# Altium PCB LEDs_2.PcbDoc
Units mm, origin at the board's own origin, x right, y up, seen from the top; angles counter-clockwise.
Board outline 19 x 19 mm, 2 copper layers (Top Layer, Bottom Layer); 66 components, 9 nets, 151 pads, 63 vias.
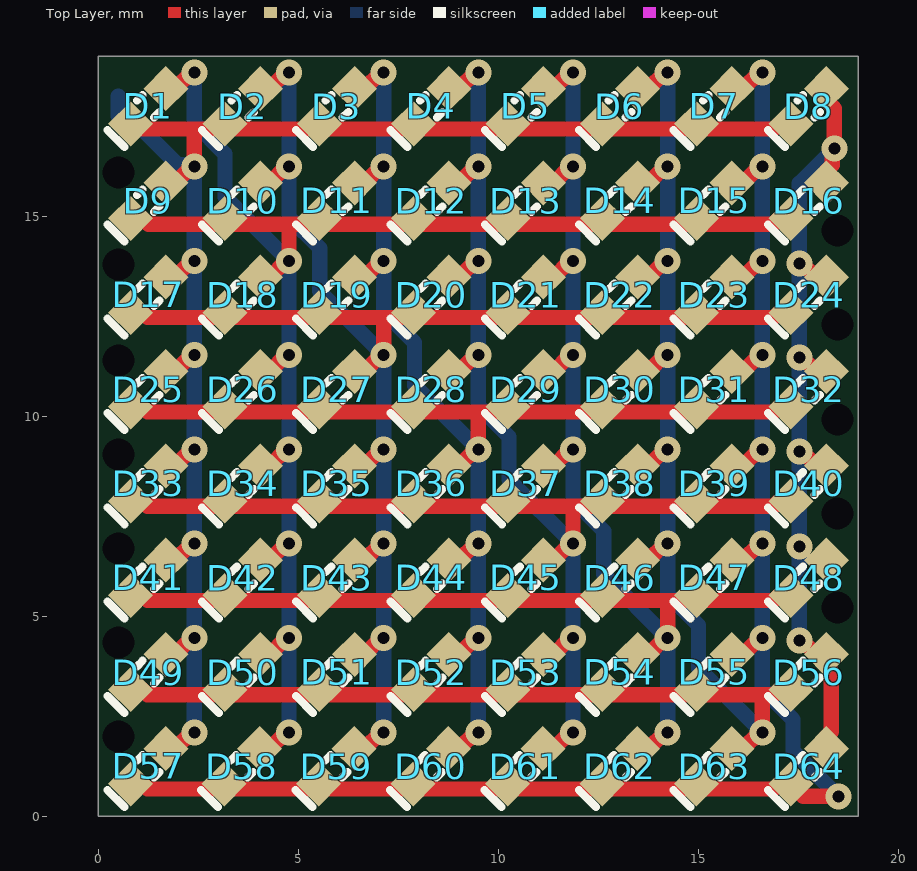
[diagram p0: Top Layer view]
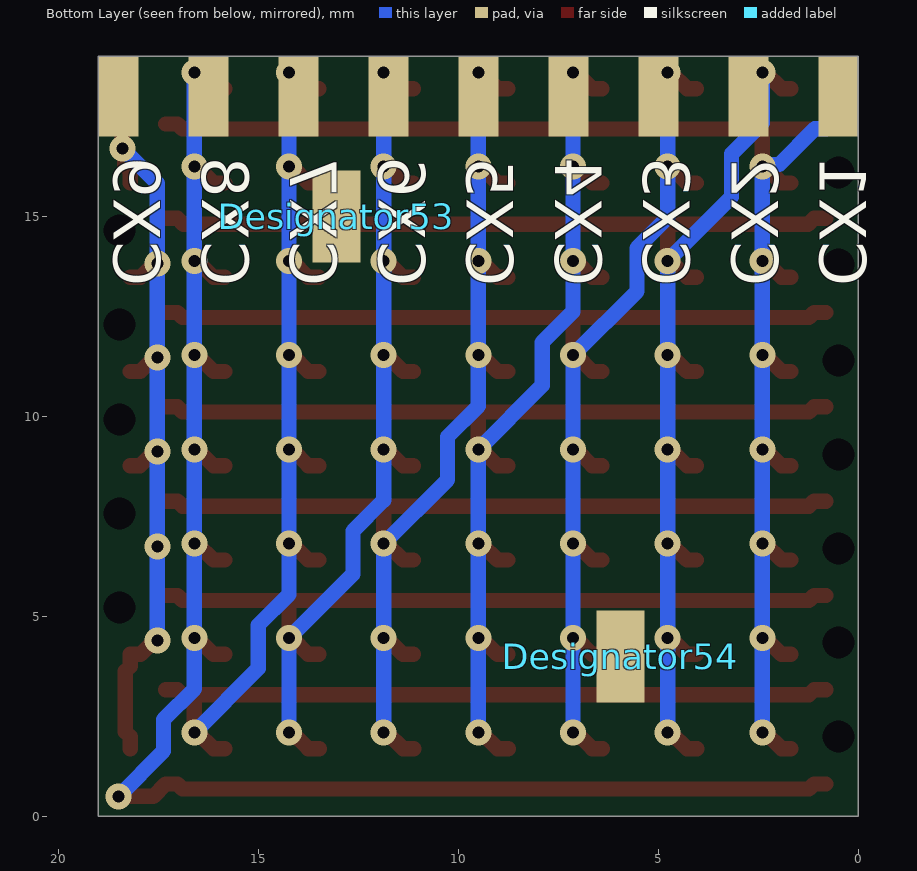
[diagram p1: Bottom Layer view, seen from below]
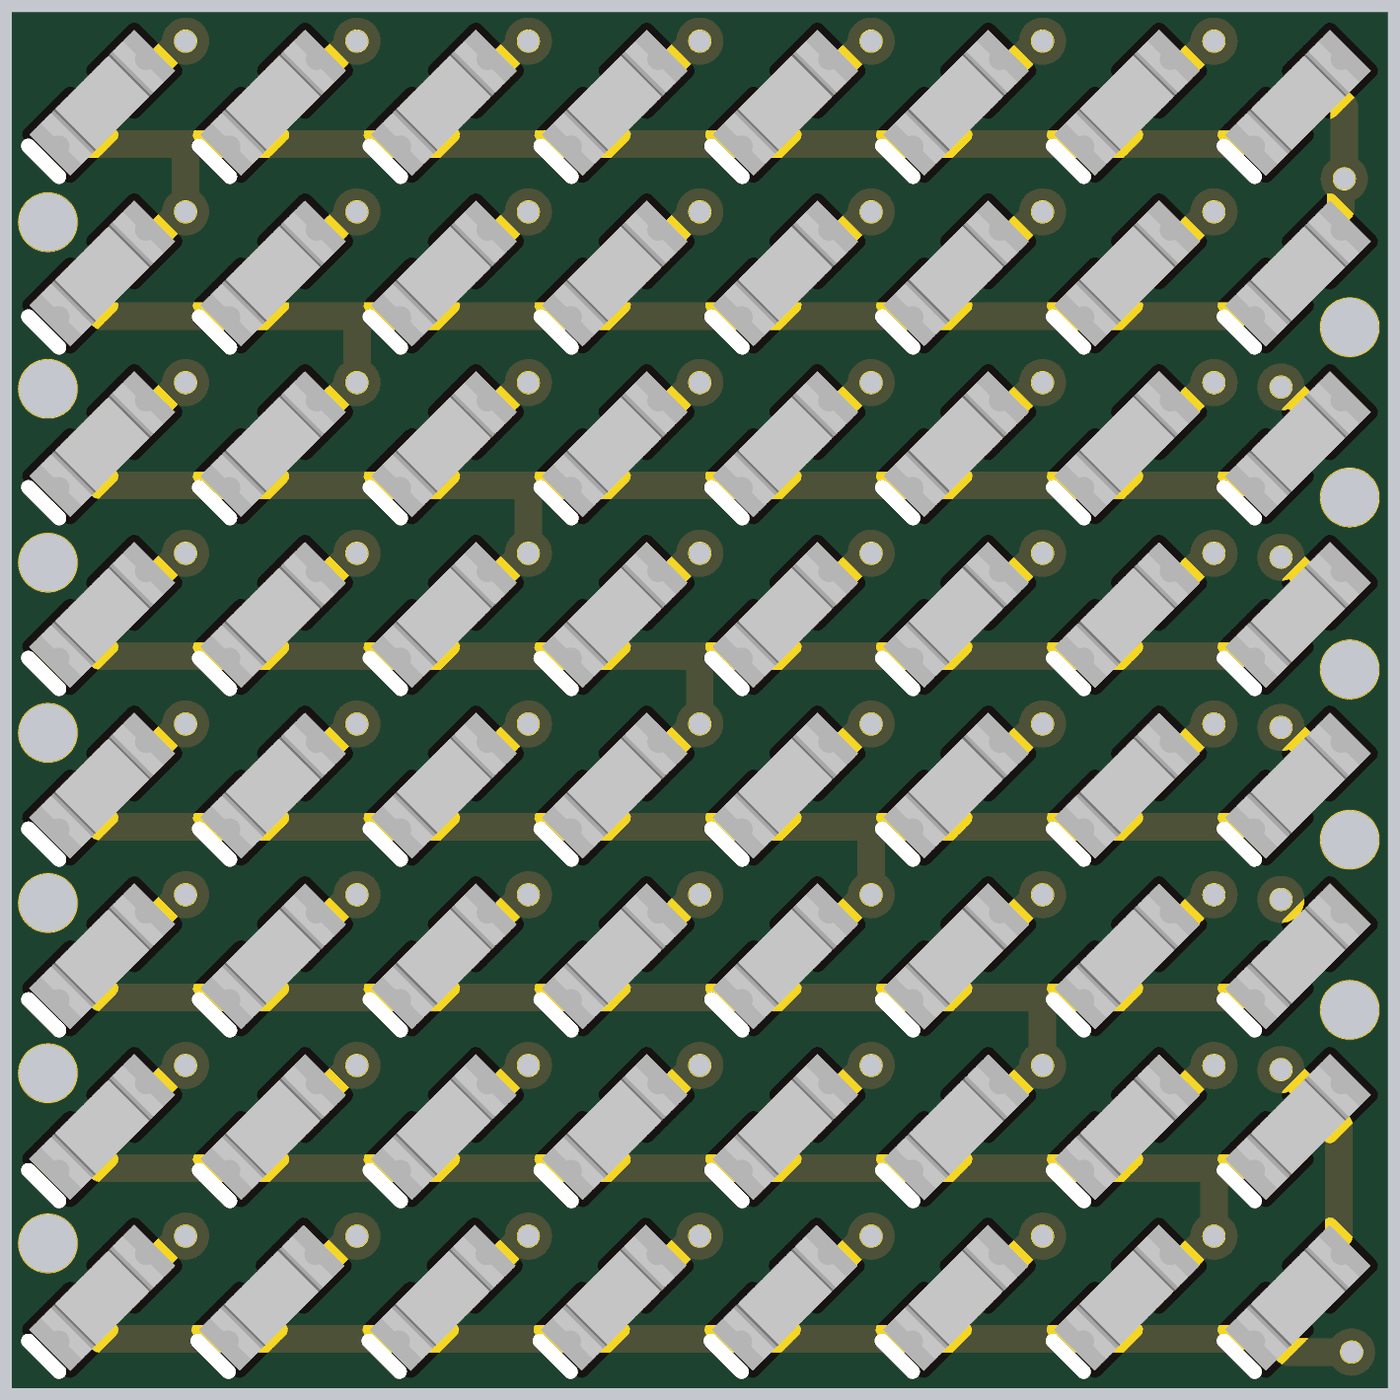
[diagram p2: 3D render of the assembled board from above, using the file's embedded part models]

## Layer stack, top to bottom
Top Solder: solder mask 0.0102, Solder Resist, Dk 3.5
Top Layer: signal copper 0.0356
Dielectric 1: dielectric 0.32, FR-4, Dk 4.8
Bottom Layer: signal copper 0.0356
Bottom Solder: solder mask 0.0102, Solder Resist, Dk 3.5

## Board outline
0,0 19,0 19,19 0,19

## Design rules (kind name [scope] priority, off if disabled: settings)
Clearance [All] p1: gap=0.254 ignorepadtopadclearanceinfootprint=FALSE except(0: Arc-Hole Track-Hole SMDPad-Hole THPad-Hole Via-Hole Fill-Hole Poly-Hole Region-Hole Text-Hole)
HoleSize [All] p1: absolutevalues=TRUE maxlimit=200.54 minlimit=0.3 maxpercent=80.000 minpercent=20.000
PolygonConnect [All] p1: connectstyle=Relief reliefconductorwidth=0.254 reliefentries=4 polygonreliefangle="90 Angle" airgapwidth=0.254
RoutingVias [All] p1: holewidth=0.3 width=0.61 viastyle="Through Hole" minholewidth=0.3 minwidth=0.61 maxholewidth=10 maxwidth=12.7
SolderMaskExpansion [All] p1: expansion=0.102
Width [All] p1: maxlimit=2.54 minlimit=0.152 preferedwidth=0.254
29 further rules are at their usual default settings.

## Components (designator, comment, footprint, x,y, rotation, side; value= is the part's Value field where it differs from the comment)
D1 "SMD LED" SML-D12x1 1.25,17.75 r45 top locked
D2 "SMD LED" SML-D12x1 3.608,17.75 r45 top locked
D3 "SMD LED" SML-D12x1 5.967,17.75 r45 top locked
D4 "SMD LED" SML-D12x1 8.325,17.75 r45 top locked
D5 "SMD LED" SML-D12x1 10.683,17.75 r45 top locked
D6 "SMD LED" SML-D12x1 13.041,17.75 r45 top locked
D7 "SMD LED" SML-D12x1 15.4,17.75 r45 top locked
D8 "SMD LED" SML-D12x1 17.758,17.75 r45 top locked
D9 "SMD LED" SML-D12x1 1.25,15.393 r45 top locked
D10 "SMD LED" SML-D12x1 3.608,15.393 r45 top locked
D11 "SMD LED" SML-D12x1 5.967,15.393 r45 top locked
D12 "SMD LED" SML-D12x1 8.325,15.393 r45 top locked
D13 "SMD LED" SML-D12x1 10.683,15.393 r45 top locked
D14 "SMD LED" SML-D12x1 13.041,15.393 r45 top locked
D15 "SMD LED" SML-D12x1 15.4,15.393 r45 top locked
D16 "SMD LED" SML-D12x1 17.758,15.393 r45 top locked
D17 "SMD LED" SML-D12x1 1.25,13.036 r45 top locked
D18 "SMD LED" SML-D12x1 3.608,13.036 r45 top locked
D19 "SMD LED" SML-D12x1 5.967,13.036 r45 top locked
D20 "SMD LED" SML-D12x1 8.325,13.036 r45 top locked
D21 "SMD LED" SML-D12x1 10.683,13.036 r45 top locked
D22 "SMD LED" SML-D12x1 13.041,13.036 r45 top locked
D23 "SMD LED" SML-D12x1 15.4,13.036 r45 top locked
D24 "SMD LED" SML-D12x1 17.758,13.036 r45 top locked
D25 "SMD LED" SML-D12x1 1.25,10.679 r45 top locked
D26 "SMD LED" SML-D12x1 3.608,10.679 r45 top locked
D27 "SMD LED" SML-D12x1 5.967,10.679 r45 top locked
D28 "SMD LED" SML-D12x1 8.325,10.679 r45 top locked
D29 "SMD LED" SML-D12x1 10.683,10.679 r45 top locked
D30 "SMD LED" SML-D12x1 13.041,10.679 r45 top locked
D31 "SMD LED" SML-D12x1 15.4,10.679 r45 top locked
D32 "SMD LED" SML-D12x1 17.758,10.679 r45 top locked
D33 "SMD LED" SML-D12x1 1.25,8.321 r45 top locked
D34 "SMD LED" SML-D12x1 3.608,8.321 r45 top locked
D35 "SMD LED" SML-D12x1 5.967,8.321 r45 top locked
D36 "SMD LED" SML-D12x1 8.325,8.321 r45 top locked
D37 "SMD LED" SML-D12x1 10.683,8.321 r45 top locked
D38 "SMD LED" SML-D12x1 13.041,8.321 r45 top locked
D39 "SMD LED" SML-D12x1 15.4,8.321 r45 top locked
D40 "SMD LED" SML-D12x1 17.758,8.321 r45 top locked
D41 "SMD LED" SML-D12x1 1.25,5.964 r45 top locked
D42 "SMD LED" SML-D12x1 3.608,5.964 r45 top locked
D43 "SMD LED" SML-D12x1 5.967,5.964 r45 top locked
D44 "SMD LED" SML-D12x1 8.325,5.964 r45 top locked
D45 "SMD LED" SML-D12x1 10.683,5.964 r45 top locked
D46 "SMD LED" SML-D12x1 13.041,5.964 r45 top locked
D47 "SMD LED" SML-D12x1 15.4,5.964 r45 top locked
D48 "SMD LED" SML-D12x1 17.758,5.964 r45 top locked
D49 "SMD LED" SML-D12x1 1.25,3.607 r45 top locked
D50 "SMD LED" SML-D12x1 3.608,3.607 r45 top locked
D51 "SMD LED" SML-D12x1 5.967,3.607 r45 top locked
D52 "SMD LED" SML-D12x1 8.325,3.607 r45 top locked
D53 "SMD LED" SML-D12x1 10.683,3.607 r45 top locked
D54 "SMD LED" SML-D12x1 13.041,3.607 r45 top locked
D55 "SMD LED" SML-D12x1 15.4,3.607 r45 top locked
D56 "SMD LED" SML-D12x1 17.758,3.607 r45 top locked
D57 "SMD LED" SML-D12x1 1.25,1.25 r45 top locked
D58 "SMD LED" SML-D12x1 3.589,1.25 r45 top locked
D59 "SMD LED" SML-D12x1 5.951,1.25 r45 top locked
D60 "SMD LED" SML-D12x1 8.312,1.25 r45 top locked
D61 "SMD LED" SML-D12x1 10.673,1.25 r45 top locked
D62 "SMD LED" SML-D12x1 13.035,1.25 r45 top locked
D63 "SMD LED" SML-D12x1 15.396,1.25 r45 top locked
D64 "SMD LED" SML-D12x1 17.758,1.25 r45 top locked
Designator53 "Comment" S0911-46R 13.05,15 r270 bottom
Designator54 "Comment" S0911-46R 5.95,4 r90 bottom

## Footprints (in the part's own frame and the unit in brackets; to place one, negate y for a bottom-side part, rotate by r counter-clockwise, add the part's x,y. Pads: shape width x height; smd on the part's side, far side on the other; paste and mask are expansions set on the pad)
S0911-46R [mm]
  rect 2.3x1.2 smd paste-10: CX13(0,0)
  body extent -1.15,-0.7 1.15,0.7, height 2
SML-D12x1 [mm]
  rect 0.8x0.8 smd: 1(-0.625,0) 2(0.625,0)
  silkscreen extent -1.14,-0.3 0.1,0.3, body extent -0.8,-0.4 0.8,0.4, height 0.55

## Part data
D1 D2 D3 D4 D5 D6 D7 D8 D9 D10 D11 D12 D13 D14 D15 D16 D17 D18 D19 D20 D21 D22 D23 D24 D25 D26 D27 D28 D29 D30 D31 D32 D33 D34 D35 D36 D37 D38 D39 D40 D41 D42 D43 D44 D45 D46 D47 D48 D49 D50 D51 D52 D53 D54 D55 D56 D57 D58 D59 D60 D61 D62 D63 D64: library part SML-D12U1WT86, "LED RED DIFFUSED 1608 SMD", Case/Package=0603, Case Code (Metric)=1608, Color=Red, Forward Voltage=2.2V, Lens Color=White, Manufacturer=Rohm, Supplier Part Number 1=SML-D12U1WT86CT-ND, Test Current=20mA, Case Code (Imperial)=0603, ComponentLink1Description=https://www.rohm.com/datasheet/SML-D12U1W?src-supplier=Digi-Key, ComponentLink1URL=https://www.rohm.com/datasheet/SML-D12U1W?src-supplier=Digi-Key, Dominant Wavelength=620nm, Height=0.65mm, Lead Free="Lead Free", Length=1.6mm, Lens Transparency=Diffused, Luminous Intensity=63mcd, Manufacturer Part Number=SML-D12U1WT86, Mount="Surface Mount", Packaging="Tape and Reel", Pricing 1="1 = 0,22000, 10 = 0,16200, 25 = 0,11920, 100 = 0,08530, 250 = 0,05796, 500 = 0,05116, 1000 = 0,04007 (USD)", RoHS=Yes, Stock 1=91784, Supplier 1=Digi-Key, Width=0.8mm

## Free pads (board coordinates)
  rect 1x2 smd far side paste-10: CX11(0.5,18) CX11(2.75,18) CX11(5,18) CX11(7.25,18) CX11(9.5,18) CX11(11.75,18) CX11(14,18) CX11(16.25,18) CX11(18.5,18)
  round 0 hole 0.8: CX12(0.5,2) CX12(0.5,4.35) CX12(0.5,6.7) CX12(0.5,9.05) CX12(0.5,11.4) CX12(0.5,13.8) CX12(0.5,16.1) CX12(18.475,5.225) CX12(18.475,7.575) CX12(18.475,9.925) CX12(18.475,12.3) CX12(18.475,14.65)

## Via types
v1: diameter 0.65, hole 0.3, Top Layer to Bottom Layer, tented both sides, 63 vias

## Nets (pads, with @x,y where several pads share a name; then routed paths per layer and width w, separated by ;. In a path a pad name is that pad's centre, name@x,y a point inside that pad or via, vN(x,y) a via of type N, cw(c..) or ccw(c..) an arc to the next point about the centre after c; other vN are vias at no path point)
CA1: D1.1 D2.1 D3.1 D4.1 D5.1 D6.1 D7.1 D8.1 D9.2 D17.2 D25.2 D33.2 D41.2 D49.2 D57.2 pad.CX11@0.5,18 | length 40.7
  Top Layer w0.381: D1.1@0.808,17.182 2.4,17.182 ; D57.2 1.919,1.692 2.327,2.1 v1(2.4,2.1) ; D49.2 1.919,4.049 2.327,4.457 v1(2.4,4.457) ; D41.2 1.919,6.406 2.327,6.814 v1(2.4,6.814) ; D33.2 1.919,8.763 2.327,9.171 v1(2.4,9.171) ; D25.2 1.919,11.121 2.327,11.529 v1(2.4,11.529) ; D17.2 1.919,13.478 2.327,13.886 v1(2.4,13.886) ; D9.2 1.919,15.835 2.327,16.243 v1(2.4,16.243) 2.4,17.182 ; D8.1 17.02,17.308 16.893,17.182 2.4,17.182
  Bottom Layer w0.381: pad.CX11@0.5,18 0.5,17.5 0.81,17.19 1.081,17.19 1.977,16.294 2.349,16.294 v1(2.4,16.243) v1(2.4,13.886) v1(2.4,11.529) v1(2.4,9.171) v1(2.4,6.814) v1(2.4,4.457) v1(2.4,2.1)
CA2: D1.2 D9.1 D10.1 D11.1 D12.1 D13.1 D14.1 D15.1 D16.1 D18.2 D26.2 D34.2 D42.2 D50.2 D58.2 pad.CX11@2.75,18 | length 41.3
  Top Layer w0.381: D9.1 1.104,14.951 1.255,14.8 4.8,14.8 ; D1.2 1.919,18.192 2.327,18.6 v1(2.4,18.6) ; D58.2 4.286,1.692 4.694,2.1 v1(4.767,2.1) ; D50.2 4.286,4.049 4.694,4.457 v1(4.767,4.457) ; D42.2 4.286,6.406 4.694,6.814 v1(4.767,6.814) ; D34.2 4.286,8.763 4.694,9.171 v1(4.767,9.171) ; D26.2 4.286,11.121 4.694,11.529 v1(4.767,11.529) ; D18.2 4.286,13.478 4.694,13.886 v1(4.767,13.886) 4.767,14.767 4.8,14.8 ; D16.1 17.02,14.951 16.869,14.8 4.8,14.8
  Bottom Layer w0.381: v1(2.4,18.6) 2.4,17.331 3.17,16.562 3.17,15.483 v1(4.767,13.886) v1(4.767,11.529) v1(4.767,9.171) v1(4.767,6.814) v1(4.767,4.457) v1(4.767,2.1)
CA3: D2.2 D10.2 D17.1 D18.1 D19.1 D20.1 D21.1 D22.1 D23.1 D24.1 D27.2 D35.2 D43.2 D51.2 D59.2 pad.CX11@5,18 | length 41.3
  Top Layer w0.381: D17.1 1.104,12.594 1.231,12.467 7.133,12.467 ; D10.2 4.286,15.835 4.694,16.243 v1(4.767,16.243) ; D2.2 4.286,18.192 4.694,18.6 v1(4.767,18.6) ; D59.2 6.652,1.692 7.061,2.1 v1(7.133,2.1) ; D51.2 6.652,4.049 7.061,4.457 v1(7.133,4.457) ; D43.2 6.652,6.406 7.061,6.814 v1(7.133,6.814) ; D35.2 6.652,8.763 7.061,9.171 v1(7.133,9.171) ; D27.2 6.652,11.121 7.061,11.529 v1(7.133,11.529) 7.133,12.467 ; D24.1 17.02,12.594 16.893,12.467 7.133,12.467
  Bottom Layer w0.381: v1(4.767,18.6) v1(4.767,16.243) 4.767,14.974 5.536,14.204 5.536,13.126 v1(7.133,11.529) v1(7.133,9.171) v1(7.133,6.814) v1(7.133,4.457) v1(7.133,2.1)
CA4: D3.2 D11.2 D19.2 D25.1 D26.1 D27.1 D28.1 D29.1 D30.1 D31.1 D32.1 D36.2 D44.2 D52.2 D60.2 pad.CX11@7.25,18 | length 41.3
  Top Layer w0.381: D25.1 1.104,10.237 1.231,10.11 9.5,10.11 ; D19.2 6.652,13.478 7.061,13.886 v1(7.133,13.886) ; D11.2 6.652,15.835 7.061,16.243 v1(7.133,16.243) ; D3.2 6.652,18.192 7.061,18.6 v1(7.133,18.6) ; D60.2 9.019,1.692 9.427,2.1 v1(9.5,2.1) ; D52.2 9.019,4.049 9.427,4.457 v1(9.5,4.457) ; D44.2 9.019,6.406 9.427,6.814 v1(9.5,6.814) ; D36.2 9.019,8.763 9.427,9.171 v1(9.5,9.171) 9.5,10.11 ; D32.1 17.02,10.237 16.893,10.11 9.5,10.11
  Bottom Layer w0.381: v1(7.133,18.6) v1(7.133,16.243) v1(7.133,13.886) 7.133,12.617 7.903,11.847 7.903,10.769 v1(9.5,9.171) v1(9.5,6.814) v1(9.5,4.457) v1(9.5,2.1)
CA5: D4.2 D12.2 D20.2 D28.2 D33.1 D34.1 D35.1 D36.1 D37.1 D38.1 D39.1 D40.1 D45.2 D53.2 D61.2 pad.CX11@9.5,18 | length 41.4
  Top Layer w0.381: D33.1 1.104,7.879 1.231,7.753 11.9,7.753 ; D28.2 9.019,11.121 9.427,11.529 v1(9.5,11.529) ; D20.2 9.019,13.478 9.427,13.886 v1(9.5,13.886) ; D12.2 9.019,15.835 9.427,16.243 v1(9.5,16.243) ; D4.2 9.019,18.192 9.427,18.6 v1(9.5,18.6) ; D61.2 11.386,1.692 11.794,2.1 v1(11.867,2.1) ; D53.2 11.386,4.049 11.794,4.457 v1(11.867,4.457) ; D45.2 11.386,6.406 11.794,6.814 v1(11.867,6.814) 11.867,7.72 11.9,7.753 ; D40.1 17.02,7.879 16.893,7.753 11.9,7.753
  Bottom Layer w0.381: v1(9.5,18.6) v1(9.5,16.243) v1(9.5,13.886) v1(9.5,11.529) 9.5,10.26 10.269,9.49 10.269,8.411 v1(11.867,6.814) v1(11.867,4.457) v1(11.867,2.1)
CA6: D5.2 D13.2 D21.2 D29.2 D37.2 D41.1 D42.1 D43.1 D44.1 D45.1 D46.1 D47.1 D48.1 D54.2 D62.2 pad.CX11@11.75,18 | length 41.4
  Top Layer w0.381: D41.1 1.104,5.522 1.231,5.396 14.2,5.396 ; D37.2 11.386,8.763 11.794,9.171 v1(11.867,9.171) ; D29.2 11.386,11.121 11.794,11.529 v1(11.867,11.529) ; D21.2 11.386,13.478 11.794,13.886 v1(11.867,13.886) ; D13.2 11.386,15.835 11.794,16.243 v1(11.867,16.243) ; D5.2 11.386,18.192 11.794,18.6 v1(11.867,18.6) ; D62.2 13.752,1.692 14.161,2.1 v1(14.233,2.1) ; D54.2 13.752,4.049 14.161,4.457 v1(14.233,4.457) 14.233,5.363 14.2,5.396 ; D48.1 17.02,5.522 16.893,5.396 14.2,5.396
  Bottom Layer w0.381: v1(11.867,18.6) v1(11.867,16.243) v1(11.867,13.886) v1(11.867,11.529) v1(11.867,9.171) 11.867,7.903 12.636,7.133 12.636,6.054 v1(14.233,4.457) v1(14.233,2.1)
CA7: D6.2 D14.2 D22.2 D30.2 D38.2 D46.2 D49.1 D50.1 D51.1 D52.1 D53.1 D54.1 D55.1 D56.1 D63.2 pad.CX11@14,18 | length 41.5
  Top Layer w0.381: D49.1 1.104,3.165 1.231,3.039 16.6,3.039 ; D46.2 13.752,6.406 14.161,6.814 v1(14.233,6.814) ; D38.2 13.752,8.763 14.161,9.171 v1(14.233,9.171) ; D30.2 13.752,11.121 14.161,11.529 v1(14.233,11.529) ; D22.2 13.752,13.478 14.161,13.886 v1(14.233,13.886) ; D14.2 13.752,15.835 14.161,16.243 v1(14.233,16.243) ; D6.2 13.752,18.192 14.161,18.6 v1(14.233,18.6) ; D63.2 16.119,1.692 16.527,2.1 v1(16.6,2.1) 16.6,3.039 ; D56.1 17.02,3.165 16.893,3.039 16.6,3.039
  Bottom Layer w0.381: v1(14.233,18.6) v1(14.233,16.243) v1(14.233,13.886) v1(14.233,11.529) v1(14.233,9.171) v1(14.233,6.814) 14.233,5.545 15.003,4.776 15.003,3.697 v1(16.6,2.1)
CA8: D7.2 D15.2 D23.2 D31.2 D39.2 D47.2 D55.2 D57.1 D58.1 D59.1 D60.1 D61.1 D62.1 D63.1 D64.1 pad.CX11@16.25,18 | length 43.3
  Top Layer w0.381: D57.1 1.104,0.808 1.231,0.682 7.87,0.682 12.593,0.682 16.893,0.682 17.02,0.808 D64.1 17.624,0.5 v1(18.5,0.5) ; D55.2 16.119,4.049 16.527,4.457 v1(16.6,4.457) ; D47.2 16.119,6.406 16.527,6.814 v1(16.6,6.814) ; D39.2 16.119,8.763 16.527,9.171 v1(16.6,9.171) ; D31.2 16.119,11.121 16.527,11.529 v1(16.6,11.529) ; D23.2 16.119,13.478 16.527,13.886 v1(16.6,13.886) ; D15.2 16.119,15.835 16.527,16.243 v1(16.6,16.243) ; D7.2 16.119,18.192 16.527,18.6 v1(16.6,18.6)
  Bottom Layer w0.381: v1(16.6,18.6) v1(16.6,16.243) v1(16.6,13.886) v1(16.6,11.529) v1(16.6,9.171) v1(16.6,6.814) v1(16.6,4.457) 16.6,3.188 17.369,2.419 17.369,1.631 v1(18.5,0.5)
CA9: D8.2 D16.2 D24.2 D32.2 D40.2 D48.2 D56.2 D64.2 pad.CX11@18.5,18 | length 20.9
  Top Layer w0.381: v1(17.525,4.4) 17.598,4.4 17.949,4.049 D56.2 18.2,3.753 18.326,3.626 18.326,2.115 18.2,1.988 D64.2 ; v1(17.525,9.125) 17.598,9.125 17.959,8.763 D40.2 ; v1(17.525,11.475) 17.598,11.475 17.952,11.121 D32.2 ; v1(17.525,13.825) 17.598,13.825 17.945,13.478 D24.2 ; D16.2 18.2,16.131 18.349,16.28 18.349,16.649 v1(18.4,16.7) 18.4,17.695 18.2,17.896 D8.2
  Bottom Layer w0.381: v1(17.525,4.4) v1(17.525,6.75) v1(17.525,9.125) v1(17.525,11.475) v1(17.525,13.825) 17.525,15.825 v1(18.4,16.7)
pads on no net: Designator53.CX13 Designator54.CX13

## Silkscreen, mask and mechanical layers (free items; w line width, h text height)
Bottom Overlay:
  text "CX1" at 1.35,13.25 h2 r90
  text "CX2" at 3.556,13.25 h2 r90
  text "CX3" at 5.762,13.25 h2 r90
  text "CX4" at 7.969,13.25 h2 r90
  text "CX5" at 10.175,13.25 h2 r90
  text "CX6" at 12.381,13.25 h2 r90
  text "CX7" at 14.587,13.25 h2 r90
  text "CX8" at 16.794,13.25 h2 r90
  text "CX9" at 19,13.25 h2 r90
Mechanical 1:
  the board outline again, w0.2
Route Tool Path (Mech5):
  lines w1: -0.5,4.75 -0.5,0 ; -0.5,14.25 -0.5,19 ; 19.5,4.75 19.5,0 ; 19.5,14.25 19.5,19 ; -0.5,0 ccw(c0,0) 0,-0.5 ; -0.5,0 ccw(c0,0) 0,-0.5 ; -0.5,19 cw(c0,19) 0,19.5 ; -0.5,19 cw(c0,19) 0,19.5 ; 0,-0.5 19,-0.5 ; 0,19.5 19,19.5 ; 19,-0.5 ccw(c19,0) 19.5,0 ; 19,-0.5 ccw(c19,0) 19.5,0 ; 19,19.5 cw(c19,19) 19.5,19 ; 19,19.5 cw(c19,19) 19.5,19